# Altium PCB Copy of 701C USB Hub.PcbDoc (part 1 of 2)
Units mil, origin at the board's own origin, x right, y up, seen from the top; angles counter-clockwise.
Board outline 4055.12 x 2244.09 mil, 4 copper layers (Component Side, Ground Plane, Power Plane, Solder Side), stack 61 mil thick; 144 components, 120 nets, 628 pads, 76 vias.
Unrouted connection lines stored in the file: 378.
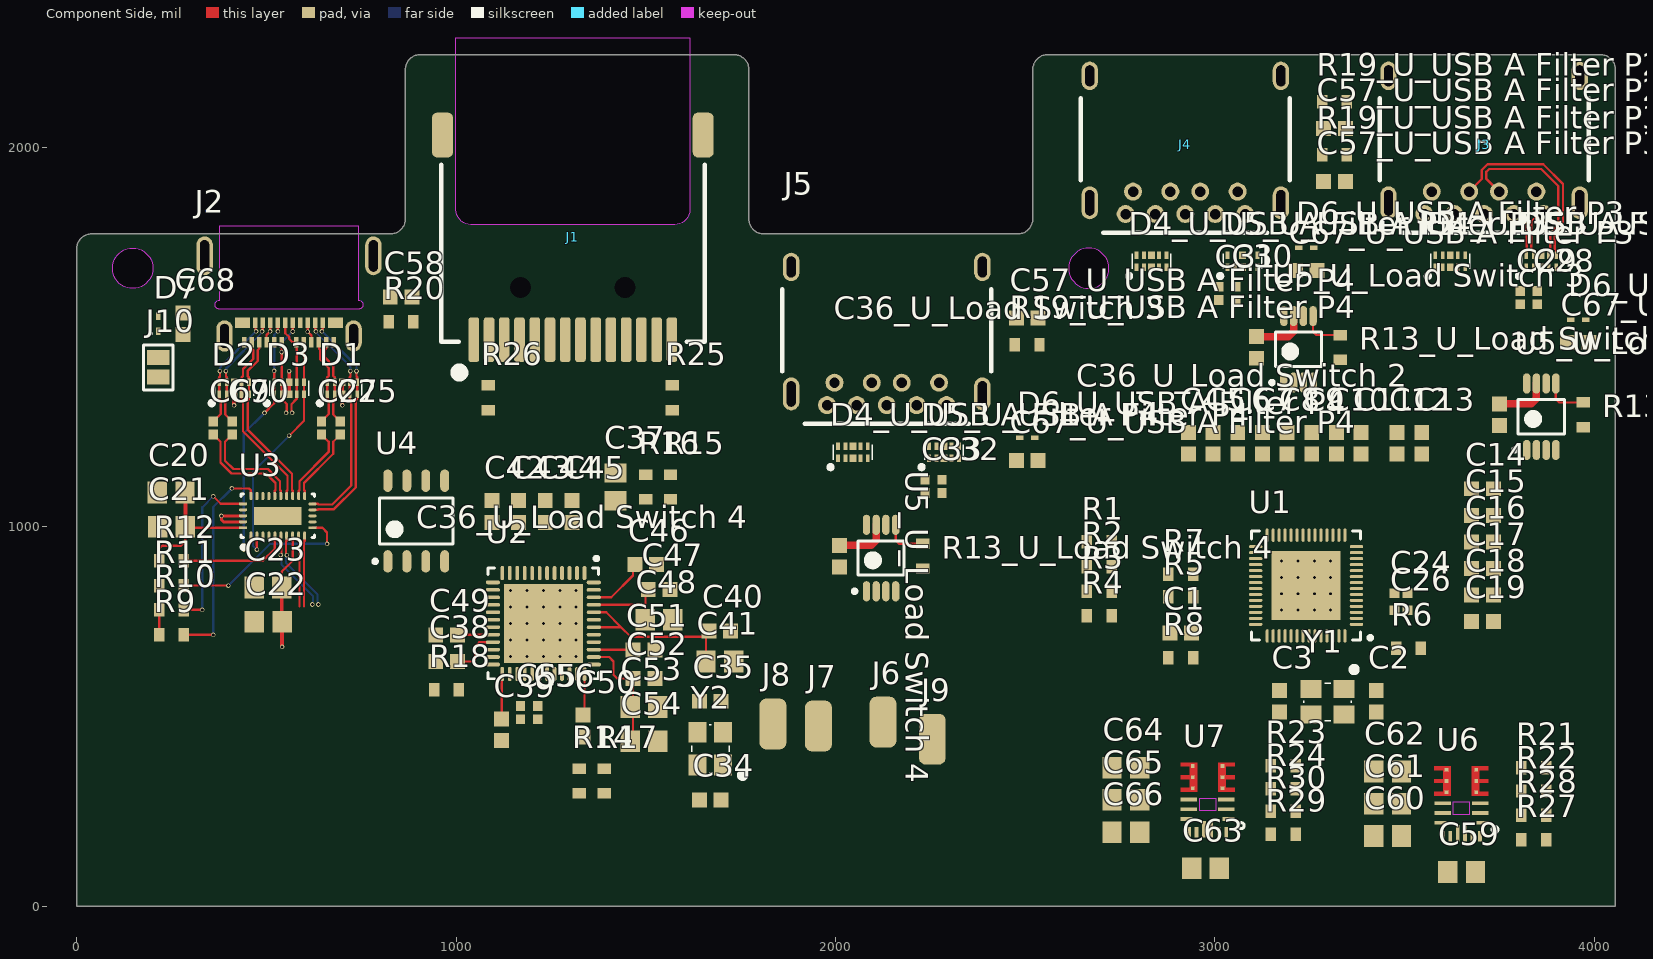
[diagram p0: Component Side view]
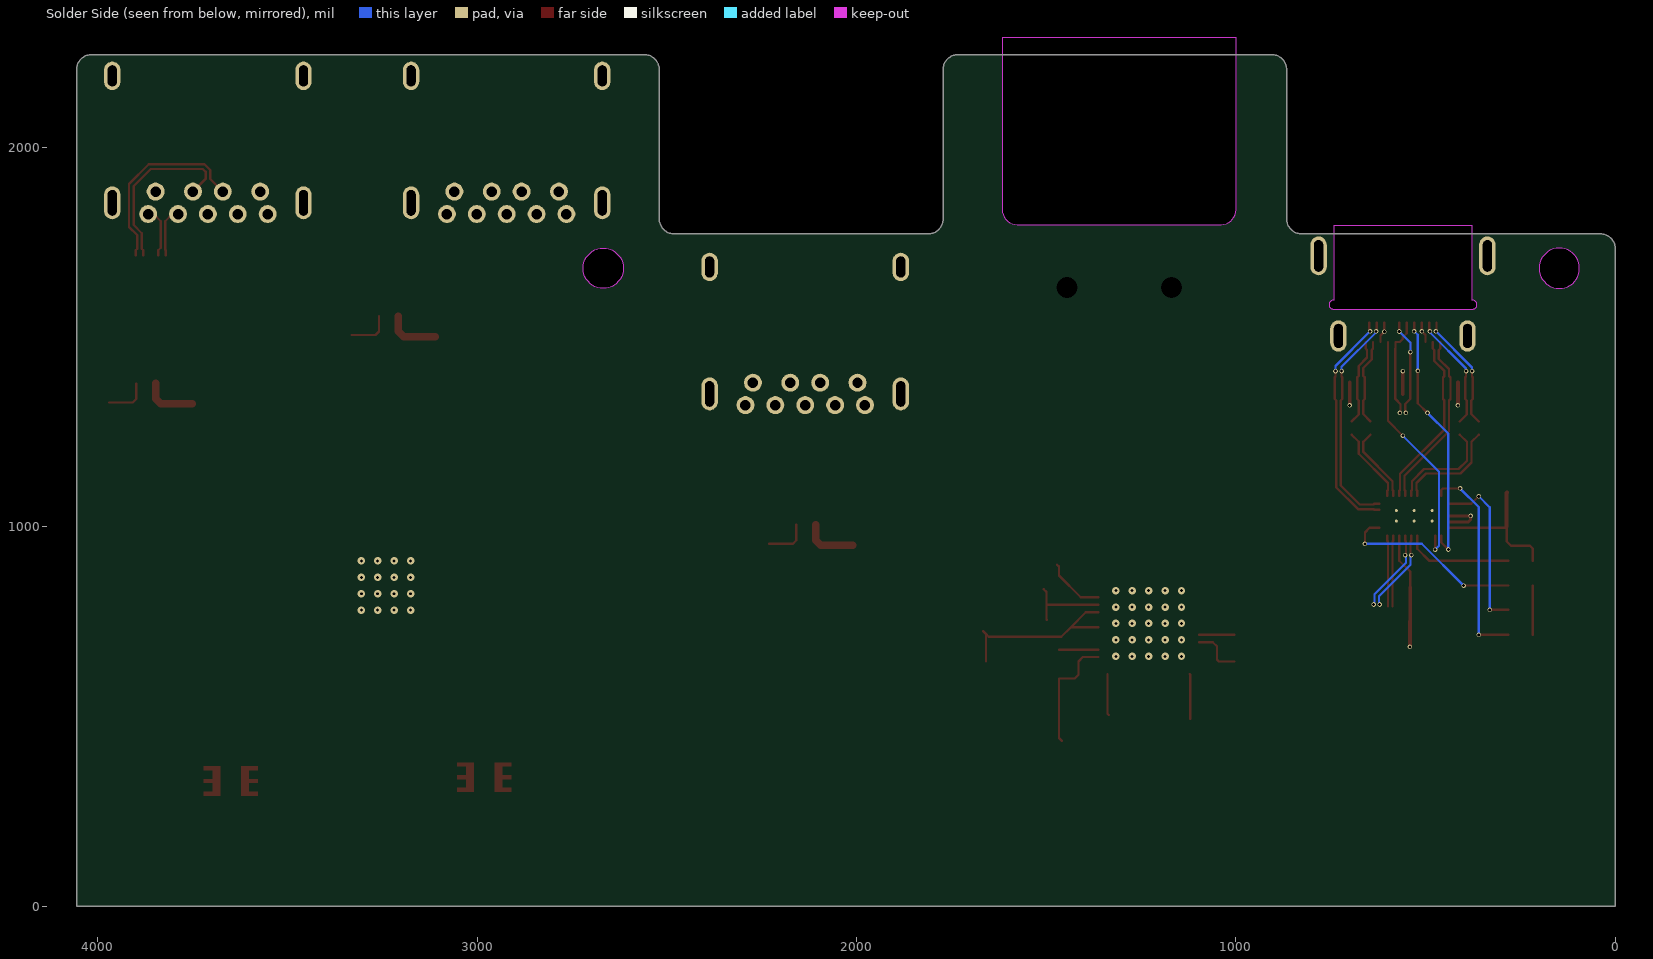
[diagram p1: Solder Side view, seen from below]
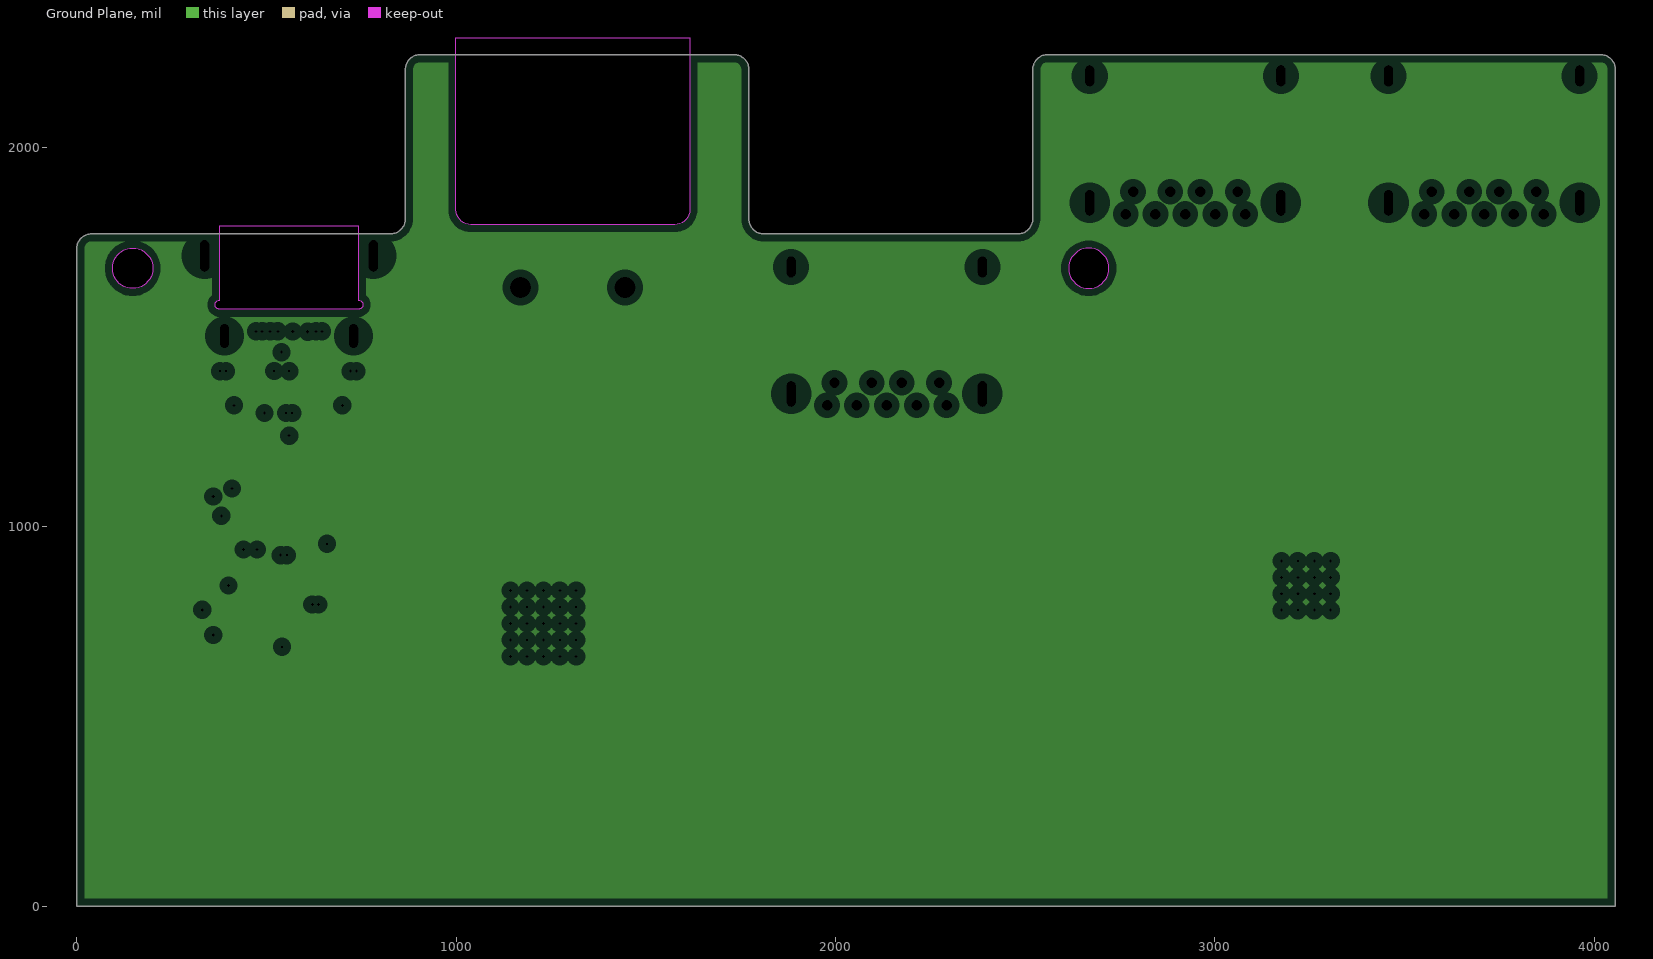
[diagram p2: Ground Plane, clearances drawn from the general rule]
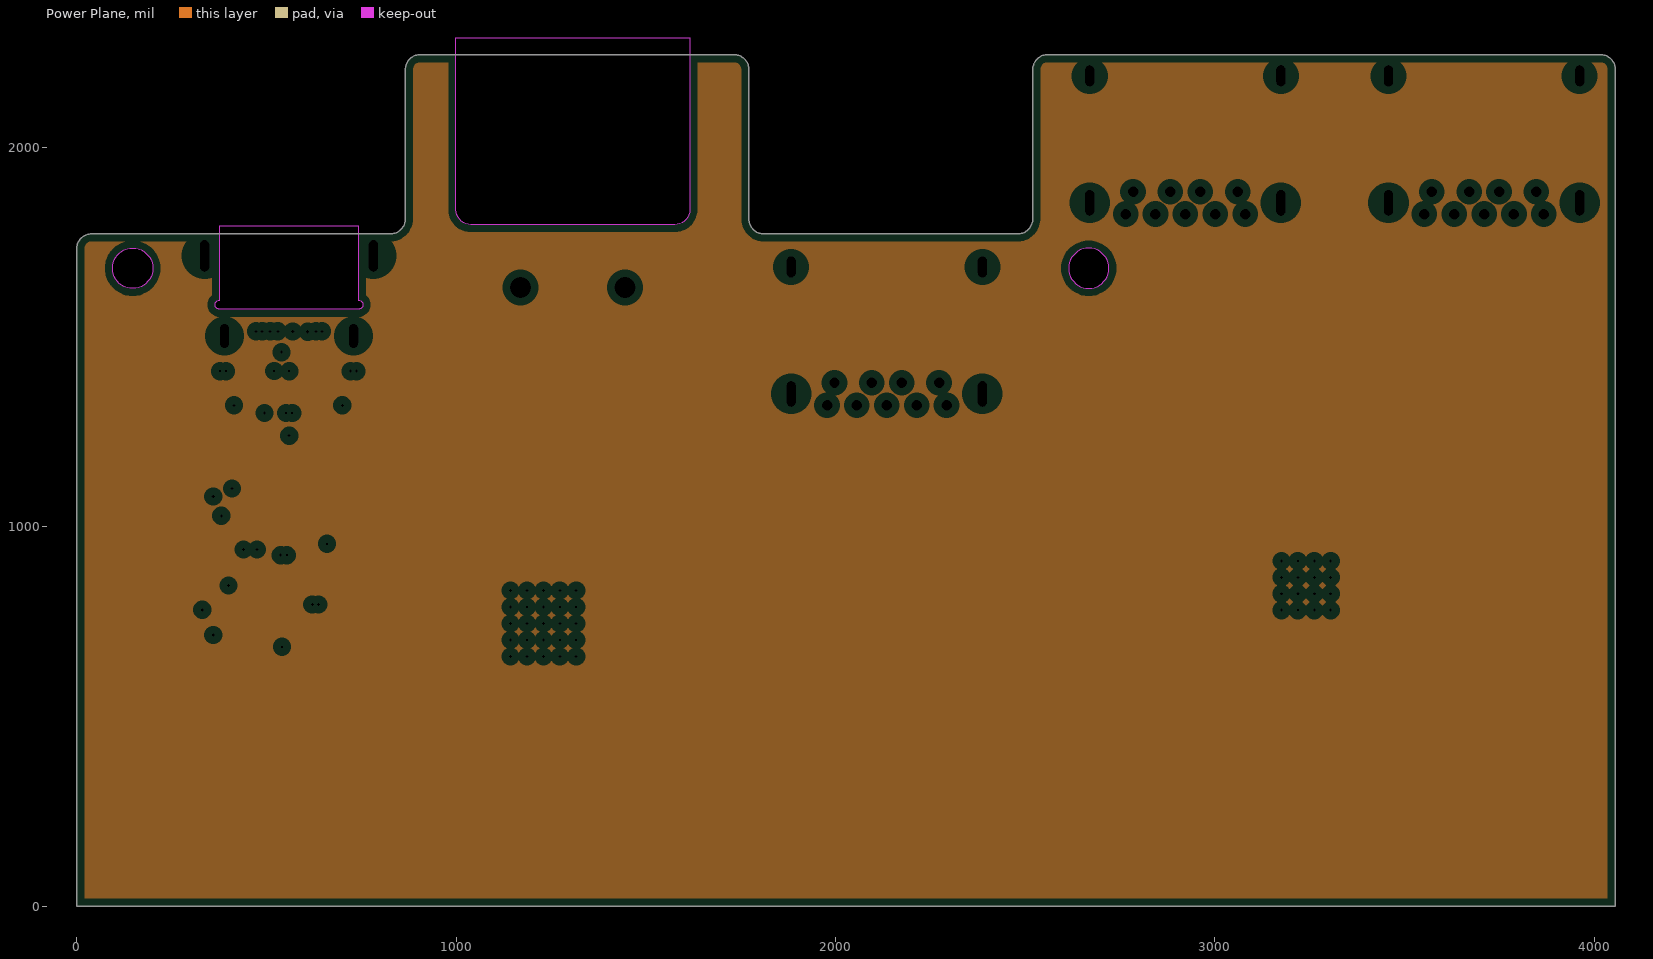
[diagram p3: Power Plane, clearances drawn from the general rule]

## Layer stack, top to bottom
Top Solder: solder mask 0.4, Solder Resist, Dk 3.5
Component Side: signal copper 1.3
Dielectric 1: core 4.3, FR-4, Dk 4.29
Ground Plane: plane copper 1.4
Dielectric 3: prepreg 47, Dk 4.2
Power Plane: plane copper 1.4
Dielectric 4: core 4.3, Dk 4.29
Solder Side: signal copper 1.3
Bottom Solder: solder mask 0.4, Solder Resist, Dk 3.5

## Board outline
0,0 0,1732.28 cw(c39.37,1732.28) 39.37,1771.65 240.16,1771.65 826.77,1771.65 ccw(c826.77,1811.02) 866.14,1811.02 866.14,2204.72 cw(c905.51,2204.72) 905.51,2244.09 1732.28,2244.09 cw(c1732.28,2204.72) 1771.65,2204.72 1771.65,1811.02 ccw(c1811.02,1811.02) 1811.02,1771.65 2480.32,1771.65 ccw(c2480.32,1811.02) 2519.69,1811.02 2519.69,2204.72 cw(c2559.06,2204.72) 2559.06,2244.09 4015.75,2244.09 cw(c4015.75,2204.72) 4055.12,2204.72 4055.12,0
cut-out: 147.64,1627.95 cw(c147.64,1681.1) 94.49,1681.1 cw(c147.64,1681.1) 147.64,1734.25 cw(c147.64,1681.1) 200.79,1681.1 cw(c147.64,1681.1)
cut-out: 2614.17,1681.1 ccw(c2667.32,1681.1) 2667.32,1627.95 ccw(c2667.32,1681.1) 2720.47,1681.1 ccw(c2667.32,1681.1) 2667.32,1734.25 ccw(c2667.32,1681.1)

## Design rules (kind name [scope] priority, off if disabled: settings)
Clearance [All] p1: gap=4 ignorepadtopadclearanceinfootprint=FALSE except(0: Arc-Hole Track-Hole SMDPad-Hole THPad-Hole Via-Hole Fill-Hole Poly-Hole Region-Hole Text-Hole)
DiffPairsRouting DiffPairsRouting_USB_SS [InNetClass('DIFF90SS')] p1: maxlimit=6 minlimit=4 mostfreqgap=6 toplayer_minwidth=4 toplayer_maxwidth=6 toplayer_prefwidth=6 bottomlayer_minwidth=4 bottomlayer_maxwidth=6 bottomlayer_prefwidth=6 maxuncoupledlength=500
DiffPairsRouting DiffPairsRouting_ENET [InNetClass('DIFF100')] p2: maxlimit=6 minlimit=4 mostfreqgap=6 toplayer_minwidth=4 toplayer_maxwidth=5 toplayer_prefwidth=5 bottomlayer_minwidth=4 bottomlayer_maxwidth=5 bottomlayer_prefwidth=5 maxuncoupledlength=500
DiffPairsRouting DiffPairsRouting_USB_HS [InNetClass('DIFF90HS')] p3: maxlimit=6 minlimit=4 mostfreqgap=6 toplayer_minwidth=4 toplayer_maxwidth=6 toplayer_prefwidth=6 bottomlayer_minwidth=4 bottomlayer_maxwidth=6 bottomlayer_prefwidth=6 maxuncoupledlength=500
DiffPairsRouting [All] p4 off: maxlimit=10 minlimit=10 mostfreqgap=10 toplayer_minwidth=15 toplayer_maxwidth=15 toplayer_prefwidth=15 bottomlayer_minwidth=15 bottomlayer_maxwidth=15 bottomlayer_prefwidth=15 maxuncoupledlength=500
MatchedLengths MatchedLengths_USB_SS [InNetClass('DIFF90SS')] p1: tolerance=5 checknetsindiffpair=TRUE checkdiffpairvsdiffpair=FALSE checkxsignals=FALSE checkothers=FALSE
MatchedLengths MatchedLengths_ENET [InNetClass('DIFF100')] p2: tolerance=50 checknetsindiffpair=TRUE checkdiffpairvsdiffpair=FALSE checkxsignals=FALSE checkothers=FALSE
MatchedLengths MatchedLengths_USB_HS [InNetClass('DIFF90HS')] p3: tolerance=50 checknetsindiffpair=TRUE checkdiffpairvsdiffpair=FALSE checkxsignals=FALSE checkothers=FALSE
PlaneClearance [All] p1: clearance=20
PlaneConnect [All] p1: planeconnectstyle=Relief reliefexpansion=20 reliefentries=4 reliefconductorwidth=10 reliefairgap=10
PolygonConnect [All] p1: connectstyle=Relief reliefconductorwidth=10 reliefentries=4 polygonreliefangle="90 Angle" airgapwidth=10
RoomDefinition "U_USB C Filter" [InComponentClass('U_USB C Filter')] p1 off: confinementstyle=ConfineIn formatcopy=TRUE lockcomponents=FALSE outline 8850,140 10415,140 10415,370 8850,370
RoomDefinition "U_USB A Filter P4" [InComponentClass('U_USB A Filter P4')] p2 off: confinementstyle=ConfineIn formatcopy=TRUE lockcomponents=FALSE outline 3375,1580 4115,1580 4115,1840 3375,1840
RoomDefinition "U_USB A Filter P3" [InComponentClass('U_USB A Filter P3')] p3 off: confinementstyle=ConfineIn formatcopy=TRUE lockcomponents=FALSE outline 2589.37,1575 3380,1575 3380,1835 2589.37,1835
RoomDefinition "U_USB A Filter P2" [InComponentClass('U_USB A Filter P2')] p4 off: confinementstyle=ConfineIn formatcopy=TRUE lockcomponents=FALSE outline 1800,992.56 2540,992.56 2540,1252.56 1800,1252.56
RoomDefinition U_Power [InComponentClass('U_Power')] p5 off: confinementstyle=ConfineIn formatcopy=TRUE lockcomponents=FALSE outline 4460,0 5725,0 5725,475 4460,475
RoomDefinition U_MUX [InComponentClass('U_MUX')] p6 off: confinementstyle=ConfineIn formatcopy=TRUE lockcomponents=FALSE outline 8745,530 10640,530 10640,870 8745,870
RoomDefinition "U_Load Switch 4" [InComponentClass('U_Load Switch 4')] p7 off: confinementstyle=ConfineIn formatcopy=TRUE lockcomponents=FALSE outline 3625,1282.44 4005,1282.44 4005,1652.44 3625,1652.44
RoomDefinition "U_Load Switch 3" [InComponentClass('U_Load Switch 3')] p8 off: confinementstyle=ConfineIn formatcopy=TRUE lockcomponents=FALSE outline 2845,1317.56 3225,1317.56 3225,1687.56 2845,1687.56
RoomDefinition "U_Load Switch 2" [InComponentClass('U_Load Switch 2')] p9 off: confinementstyle=ConfineIn formatcopy=TRUE lockcomponents=FALSE outline 2040,730 2420,730 2420,1100 2040,1100
RoomDefinition U_LAN [InComponentClass('U_LAN')] p10 off: confinementstyle=ConfineIn formatcopy=TRUE lockcomponents=FALSE outline 9860,3205 10865,3205 10865,4365 9860,4365
RoomDefinition U_Hub [InComponentClass('U_Hub')] p11 off: confinementstyle=ConfineIn formatcopy=TRUE lockcomponents=FALSE outline 2630,340 3875,340 3875,1260 2630,1260
RoomDefinition "Top Level" [InComponentClass('Top Level')] p12 off: confinementstyle=ConfineIn formatcopy=TRUE lockcomponents=FALSE outline 421.18,4243.03 4516.18,4243.03 4516.18,8215.35 421.18,8215.35
RoutingVias [All] p1: holewidth=10 width=14 viastyle="Through Hole" minholewidth=8 minwidth=12 maxholewidth=16 maxwidth=20
SolderMaskExpansion [All] p1: expansion=4
Width [All] p1: maxlimit=20 minlimit=4 preferedwidth=6 minimp=50.000000 maximp=50.000000 favimp=50.000000
27 further rules are at their usual default settings.

## Classes and differential pairs
net class DIFF100: TR0_N TR0_P TR1_N TR1_P TR2_N TR2_P TR3_N TR3_P
net class DIFF90HS: DFP1_D_N DFP1_D_P DFP2_D_N DFP2_D_P DFP3_D_N DFP3_D_P DFP4_D_N DFP4_D_P UFP_D_N UFP_D_P
net class DIFF90SS: DFP1_RXa_N DFP1_RXa_P DFP1_RXb_N DFP1_RXb_P DFP1_TXa_N DFP1_TXa_P DFP1_TXb_N DFP1_TXb_P DFP2_RX_N DFP2_RX_P DFP2_TXa_N DFP2_TXa_P DFP2_TXb_N DFP2_TXb_P DFP3_RX_N DFP3_RX_P DFP3_TXa_N DFP3_TXa_P DFP3_TXb_N DFP3_TXb_P DFP4_RX_N DFP4_RX_P DFP4_TXa_N DFP4_TXa_P DFP4_TXb_N DFP4_TXb_P MUX_RX_N MUX_RX_P MUX_TX_N MUX_TX_P UFP_RX1_N UFP_RX1_P UFP_RX2_N UFP_RX2_P UFP_TX1_N UFP_TX1_P UFP_TX1b_N UFP_TX1b_P UFP_TX2_N UFP_TX2_P UFP_TX2b_N UFP_TX2b_P
channel class "USB A Filter": "U_USB A Filter P2" "U_USB A Filter P3" "U_USB A Filter P4"
channel class "Load Switch": "U_Load Switch 2" "U_Load Switch 3" "U_Load Switch 4"
component class "U_USB C Filter": C58 C68 D1 D2 D3 D7 J10 R20
component class "U_USB A Filter P4": "C57_U_USB A Filter P4" "C67_U_USB A Filter P4" "D4_U_USB A Filter P4" "D5_U_USB A Filter P4" "D6_U_USB A Filter P4" "R19_U_USB A Filter P4"
component class "U_USB A Filter P3": "C57_U_USB A Filter P3" "C67_U_USB A Filter P3" "D4_U_USB A Filter P3" "D5_U_USB A Filter P3" "D6_U_USB A Filter P3" "R19_U_USB A Filter P3"
component class "U_USB A Filter P2": "C57_U_USB A Filter P2" "C67_U_USB A Filter P2" "D4_U_USB A Filter P2" "D5_U_USB A Filter P2" "D6_U_USB A Filter P2" "R19_U_USB A Filter P2"
component class U_Power: C59 C60 C61 C62 C63 C64 C65 C66 R21 R22 R23 R24 R27 R28 R29 R30 U6 U7
component class U_MUX: C20 C21 C22 C23 R9 R10 R11 R12 U3
component class "U_Load Switch 4": "C36_U_Load Switch 4" "R13_U_Load Switch 4" "U5_U_Load Switch 4"
component class "U_Load Switch 3": "C36_U_Load Switch 3" "R13_U_Load Switch 3" "U5_U_Load Switch 3"
component class "U_Load Switch 2": "C36_U_Load Switch 2" "R13_U_Load Switch 2" "U5_U_Load Switch 2"
component class U_LAN: C34 C35 C37 C38 C39 C40 C41 C42 C43 C44 C45 C46 C47 C48 C49 C50 C51 C52 C53 C54 R14 R15 R16 R17 R18 U2 U4 Y2
component class U_Hub: C1 C2 C3 C4 C5 C6 C7 C8 C9 C10 C11 C12 C13 C14 C15 C16 C17 C18 C19 R1 R2 R3 R4 R5 R6 R7 R8 U1 Y1
component class "Top Level": C24 C25 C26 C27 C28 C29 C30 C31 C32 C33 C55 C56 C69 C70 J1 J2 J3 J4 J5 J6 J7 J8 J9 R25 R26
differential pair TR3: +TR3_P -TR3_N
differential pair TR2: +TR2_P -TR2_N
differential pair TR1: +TR1_P -TR1_N
differential pair TR0: +TR0_P -TR0_N
differential pair UFP_TX2b: +UFP_TX2b_P -UFP_TX2b_N
differential pair UFP_TX1b: +UFP_TX1b_P -UFP_TX1b_N
differential pair MUX_TX: +MUX_TX_P -MUX_TX_N
differential pair MUX_RX: +MUX_RX_P -MUX_RX_N
differential pair DFP4_TXb: +DFP4_TXb_P -DFP4_TXb_N
differential pair DFP4_TXa: +DFP4_TXa_P -DFP4_TXa_N
differential pair DFP4_RX: +DFP4_RX_P -DFP4_RX_N
differential pair DFP4_D: +DFP4_D_P -DFP4_D_N
differential pair DFP3_TXb: +DFP3_TXb_P -DFP3_TXb_N
differential pair DFP3_TXa: +DFP3_TXa_P -DFP3_TXa_N
differential pair DFP3_RX: +DFP3_RX_P -DFP3_RX_N
differential pair DFP3_D: +DFP3_D_P -DFP3_D_N
differential pair DFP2_TXb: +DFP2_TXb_P -DFP2_TXb_N
differential pair DFP2_TXa: +DFP2_TXa_P -DFP2_TXa_N
differential pair DFP2_RX: +DFP2_RX_P -DFP2_RX_N
differential pair DFP2_D: +DFP2_D_P -DFP2_D_N
differential pair DFP1_TXb: +DFP1_TXb_P -DFP1_TXb_N
differential pair DFP1_TXa: +DFP1_TXa_P -DFP1_TXa_N
differential pair DFP1_RXb: +DFP1_RXb_P -DFP1_RXb_N
differential pair DFP1_RXa: +DFP1_RXa_P -DFP1_RXa_N
differential pair DFP1_D: +DFP1_D_P -DFP1_D_N
differential pair UFP_TX2: +UFP_TX2_P -UFP_TX2_N
differential pair UFP_TX1: +UFP_RX2_P -UFP_RX2_N
differential pair UFP_RX2: +UFP_TX1_P -UFP_TX1_N
differential pair UFP_RX1: +UFP_RX1_P -UFP_RX1_N
differential pair UFP_D: +UFP_D_P -UFP_D_N

## Components (designator, comment, footprint, x,y, rotation, side; value= is the part's Value field where it differs from the comment)
C1 "100nF" CAP_SM0603_YAGEOCC2_N 2910,720 r180 top
C2 "10pF" CAP_SM0603_YAGEOCC2_N 3425,540 r90 top
C3 "10pF" CAP_SM0603_YAGEOCC2_N 3170,540 r270 top
C4 "100nF" CAP_SM0603_YAGEOCC2_N 2930,1220 r90 top
C5 "100nF" CAP_SM0603_YAGEOCC2_N 2995,1220 r90 top
C6 "100nF" CAP_SM0603_YAGEOCC2_N 3060,1220 r90 top
C7 "100nF" CAP_SM0603_YAGEOCC2_N 3125,1220 r90 top
C8 "100nF" CAP_SM0603_YAGEOCC2_N 3190,1220 r90 top
C9 "100nF" CAP_SM0603_YAGEOCC2_N 3255,1220 r90 top
C10 "100nF" CAP_SM0603_YAGEOCC2_N 3320,1220 r90 top
C11 "100nF" CAP_SM0603_YAGEOCC2_N 3385,1220 r90 top
C12 "1nF" CAP_SM0603_YAGEOCC2_N 3480,1220 r90 top
C13 "1nF" CAP_SM0603_YAGEOCC2_N 3545,1220 r90 top
C14 "100nF" CAP_SM0603_YAGEOCC2_N 3705,1100 r0 top
C15 "100nF" CAP_SM0603_YAGEOCC2_N 3705,1030 r0 top
C16 "100nF" CAP_SM0603_YAGEOCC2_N 3705,960 r0 top
C17 "100nF" CAP_SM0603_YAGEOCC2_N 3705,890 r0 top
C18 "1nF" CAP_SM0603_YAGEOCC2_N 3705,820 r0 top
C19 "1nF" CAP_SM0603_YAGEOCC2_N 3705,750 r0 top
C20 "1uF" CAP_SM0805_YAGEOCC2_N 249.02,1090 r180 top
C21 "1uF" CAP_SM0805_YAGEOCC2_N 250,1000 r180 top
C22 "1uF" CAP_SM0805_YAGEOCC2_N 505,750 r180 top
C23 "1uF" CAP_SM0805_YAGEOCC2_N 504.02,840 r180 top
C24 "100nF" CAP_SM0402_YAGEOCA2_N 3490,825 r0 top
C25 "100nF" CAP_SM0402_YAGEOCA2_N 695,1260 r270 top
C26 "100nF" CAP_SM0402_YAGEOCA2_N 3490,780 r0 top
C27 "100nF" CAP_SM0402_YAGEOCA2_N 645,1260 r270 top
C28 "100nF" CAP_SM0402_YAGEOCA2_N 3849.21,1603.55 r90 top
C29 "100nF" CAP_SM0402_YAGEOCA2_N 3804.21,1603.55 r90 top
C30 "100nF" CAP_SM0402_YAGEOCA2_N 3055,1615 r90 top
C31 "100nF" CAP_SM0402_YAGEOCA2_N 3010,1615 r90 top
C32 "100nF" CAP_SM0402_YAGEOCA2_N 2280.79,1106.45 r90 top
C33 "100nF" CAP_SM0402_YAGEOCA2_N 2235.79,1106.45 r90 top
C34 "10pF" CAP_SM0603_YAGEOCC2_N 1670,280 r180 top
C35 "10pF" CAP_SM0603_YAGEOCC2_N 1670,540 r0 top
"C36_U_Load Switch 2" "100nF" CAP_SM0603_YAGEOCC2_N 3750,1295 r270 top (schematic designator C36)
"C36_U_Load Switch 3" "100nF" CAP_SM0603_YAGEOCC2_N 3110,1472.56 r270 top (schematic designator C36)
"C36_U_Load Switch 4" "100nF" CAP_SM0603_YAGEOCC2_N 2010,922.44 r270 top (schematic designator C36)
C37 "1uF" CAP_SM0805_YAGEOCC2_N 1420,1105 r270 top
C38 "100nF" CAP_SM0603_YAGEOCC2_N 975,645 r180 top
C39 "100nF" CAP_SM0603_YAGEOCC2_N 1120,465 r270 top
C40 "100nF" CAP_SM0603_YAGEOCC2_N 1695,725 r0 top
C41 "1uF" CAP_SM0805_YAGEOCC2_N 1695,645 r0 top
C42 "100nF" CAP_SM0603_YAGEOCC2_N 1095,1040 r90 top
C43 "100nF" CAP_SM0603_YAGEOCC2_N 1165,1040 r90 top
C44 "100nF" CAP_SM0603_YAGEOCC2_N 1235,1040 r90 top
C45 "100nF" CAP_SM0603_YAGEOCC2_N 1305,1040 r90 top
C46 "100nF" CAP_SM0603_YAGEOCC2_N 1500,900 r0 top
C47 "100nF" CAP_SM0603_YAGEOCC2_N 1535,835 r0 top
C48 "1uF" CAP_SM0805_YAGEOCC2_N 1535,755 r0 top
C49 "100nF" CAP_SM0603_YAGEOCC2_N 975,715 r180 top
C50 "100nF" CAP_SM0603_YAGEOCC2_N 1335,475 r270 top
C51 "100nF" CAP_SM0603_YAGEOCC2_N 1495,675 r0 top
C52 "100nF" CAP_SM0603_YAGEOCC2_N 1495,600 r0 top
C53 "1uF" CAP_SM0805_YAGEOCC2_N 1495,525 r0 top
C54 "1uF" CAP_SM0805_YAGEOCC2_N 1495,435 r0 top
C55 "100nF" CAP_SM0402_YAGEOCA2_N 1170,510 r90 top
C56 "100nF" CAP_SM0402_YAGEOCA2_N 1215,510 r90 top
"C57_U_USB A Filter P2" "100nF" CAP_SM0603_YAGEOCC2_N 3315,2050 r180 top (schematic designator C57)
"C57_U_USB A Filter P3" "100nF" CAP_SM0603_YAGEOCC2_N 3315,1910 r0 top (schematic designator C57)
"C57_U_USB A Filter P4" "100nF" CAP_SM0603_YAGEOCC2_N 2505,1550 r0 top (schematic designator C57)
C58 "100nF" CAP_SM0603_YAGEOCC2_N 855,1605 r0 top
C59 "2.2uF" CAP_SM0805_YAGEOCC2_N 3650,90 r180 top
C60 "2.2uF" CAP_SM0805_YAGEOCC2_N 3455,185 r180 top
C61 "2.2uF" CAP_SM0805_YAGEOCC2_N 3455,270 r180 top
C62 "2.2uF" CAP_SM0805_YAGEOCC2_N 3455,355 r180 top
C63 "2.2uF" CAP_SM0805_YAGEOCC2_N 2975,100 r180 top
C64 "2.2uF" CAP_SM0805_YAGEOCC2_N 2765,365 r0 top
C65 "2.2uF" CAP_SM0805_YAGEOCC2_N 2765,280 r0 top
C66 "2.2uF" CAP_SM0805_YAGEOCC2_N 2765,195 r0 top
"C67_U_USB A Filter P2" "100nF" CAP_SM0603_YAGEOCC2_N 3957.44,1485 r0 top (schematic designator C67)
"C67_U_USB A Filter P3" "100nF" CAP_SM0603_YAGEOCC2_N 3240.31,1675 r0 top (schematic designator C67)
"C67_U_USB A Filter P4" "100nF" CAP_SM0603_YAGEOCC2_N 2505,1175 r0 top (schematic designator C67)
C68 "100nF" CAP_SM0603_YAGEOCC2_N 280,1535 r90 top
C69 "100nF" CAP_SM0402_YAGEOCA2_N 360,1260 r270 top
C70 "100nF" CAP_SM0402_YAGEOCA2_N 410,1260 r270 top
D1 "ESD8004MUTAG" ESD8004MUTAG 700,1365 r0 top
D2 "ESD8004MUTAG" ESD8004MUTAG 415,1365 r0 top
D3 "ESD8004MUTAG" ESD8004MUTAG 560,1365 r0 top
"D4_U_USB A Filter P2" "ESD8004MUTAG" ESD8004MUTAG 3620,1700 r0 top (schematic designator D4)
"D4_U_USB A Filter P3" "ESD8004MUTAG" ESD8004MUTAG 2832.6,1700 r0 top (schematic designator D4)
"D4_U_USB A Filter P4" "ESD8004MUTAG" ESD8004MUTAG 2045.79,1196.45 r0 top (schematic designator D4)
"D5_U_USB A Filter P2" "ESD8004MUTAG" ESD8004MUTAG 3860,1700 r0 top (schematic designator D5)
"D5_U_USB A Filter P3" "ESD8004MUTAG" ESD8004MUTAG 3072.6,1700 r0 top (schematic designator D5)
"D5_U_USB A Filter P4" "ESD8004MUTAG" ESD8004MUTAG 2285.79,1196.45 r0 top (schematic designator D5)
"D6_U_USB A Filter P2" "ESD9C5.0ST5G" "SODFL100X40-2N - ESD9C5.0ST5G" 3957.44,1545 r0 top (schematic designator D6)
"D6_U_USB A Filter P3" "ESD9C5.0ST5G" "SODFL100X40-2N - ESD9C5.0ST5G" 3240.31,1735 r0 top (schematic designator D6)
"D6_U_USB A Filter P4" "ESD9C5.0ST5G" "SODFL100X40-2N - ESD9C5.0ST5G" 2505,1235 r0 top (schematic designator D6)
D7 "ESD9C5.0ST5G" "SODFL100X40-2N - ESD9C5.0ST5G" 215,1535 r90 top
J1 "7498111120R" 7498111120R 1307.68,1630.75 r0 top
J2 "1054550101" 1054550101 559.64,1537.84 r180 top
J3 "0483930003" 0483930003 3709.25,1853.59 r180 top
J4 "0483930003" 0483930003 2921.85,1853.59 r180 top
J5 "0483930003" 0483930003 2135.04,1350.04 r180 top
J6 "RCS-0C" RCS-0C 2125,485 r0 top
J7 "RCS-0C" RCS-0C 1955,475 r0 top
J8 "RCS-0C" RCS-0C 1835,480 r0 top
J9 "RCS-0C" RCS-0C 2255,440 r0 top
J10 "Jumper SMD 2" "Jumper SMD 2" 215,1420 r90 top
R1 "10K" RES_SM0603_YAGEORC_N 2695,960 r0 top
R2 "10K" RES_SM0603_YAGEORC_N 2695,895 r0 top
R3 "200K" RES_SM0603_YAGEORC_N 2695,830 r0 top
R4 "200K" RES_SM0603_YAGEORC_N 2695,765 r0 top
R5 "39K" RES_SM0603_YAGEORC_N 2910,815 r180 top
R6 "12K" RES_SM0603_YAGEORC_N 3510,680 r180 top
R7 "82K" RES_SM0603_YAGEORC_N 2910,875 r0 top
R8 "10K" RES_SM0603_YAGEORC_N 2910,655 r180 top
R9 "4K7" RES_SM0603_YAGEORC_N 250,715 r180 top
R10 "4K7" RES_SM0603_YAGEORC_N 250,780.98 r180 top
R11 "220K" RES_SM0603_YAGEORC_N 250,845 r180 top
R12 "909K" RES_SM0603_YAGEORC_N 250,910 r180 top
"R13_U_Load Switch 2" "270R" RES_SM0603_YAGEORC_N 3970,1295 r90 top (schematic designator R13)
"R13_U_Load Switch 3" "270R" RES_SM0603_YAGEORC_N 3330,1472.56 r90 top (schematic designator R13)
"R13_U_Load Switch 4" "270R" RES_SM0603_YAGEORC_N 2230,922.44 r90 top (schematic designator R13)
R14 "12K" RES_SM0603_YAGEORC_N 1325,330 r270 top
R15 "1K" RES_SM0603_YAGEORC_N 1565,1105 r90 top
R16 "1K" RES_SM0603_YAGEORC_N 1500,1105 r270 top
R17 "12K" RES_SM0603_YAGEORC_N 1390,330 r90 top
R18 "12K" RES_SM0603_YAGEORC_N 975,570 r180 top
"R19_U_USB A Filter P2" "330R" RES_SM0603_YAGEORC_N 3315,2120 r0 top (schematic designator R19)
"R19_U_USB A Filter P3" "330R" RES_SM0603_YAGEORC_N 3315,1980 r180 top (schematic designator R19)
"R19_U_USB A Filter P4" "330R" RES_SM0603_YAGEORC_N 2505,1480 r180 top (schematic designator R19)
R20 "330R" RES_SM0603_YAGEORC_N 855,1540 r180 top
R21 "68K" RES_SM0603_YAGEORC_N 3840,365 r0 top
R22 "22K" RES_SM0603_YAGEORC_N 3840,303.5 r180 top
R23 "56K" RES_SM0603_YAGEORC_N 3180,370 r0 top
R24 "120K" RES_SM0603_YAGEORC_N 3180,310 r180 top
R25 "100R" RES_SM0603_YAGEORC_N 1570,1340 r90 top
R26 "100R" RES_SM0603_YAGEORC_N 1085,1340 r90 top
R27 "120K" RES_SM0603_YAGEORC_N 3840,175 r180 top
R28 "120K" RES_SM0603_YAGEORC_N 3840,240 r180 top
R29 "120K" RES_SM0603_YAGEORC_N 3180,190 r180 top
R30 "120K" RES_SM0603_YAGEORC_N 3180,250 r180 top
U1 "USB5744/2G abc" "QFN40P700X700X100_HS-57N - USB5744/2G" 3240,845 r180 top
U2 "LAN7800/Y9X" "QFN50P700X700X100_HS-49N - LAN7800/Y9X" 1230,745 r270 top
U3 "HD3SS3220IRNHT" "QFN40P250X450X80_HS-31N - HD3SS3220IRNHT" 530,1028.78 r90 top
U4 "93AA66CT-I/SN" "SOIC127P600X175-8N - 93AA66CT-I/SN" 895,1015 r90 top
"U5_U_Load Switch 2" "MIC2544-1YMM" "TSOP65P490X110-8N - MIC2544-1YMM" 3860,1290 r90 top (schematic designator U5)
"U5_U_Load Switch 3" "MIC2544-1YMM" "TSOP65P490X110-8N - MIC2544-1YMM" 3220,1467.56 r90 top (schematic designator U5)
"U5_U_Load Switch 4" "MIC2544-1YMM" "TSOP65P490X110-8N - MIC2544-1YMM" 2120,917.44 r90 top (schematic designator U5)
U6 "MPM3610AGQV-P" MPM3610AGQV-P 3649.37,280.79 r180 top
U7 "MPM3610AGQV-P" MPM3610AGQV-P 2980.63,290.79 r180 top
Y1 "ABM8G-25.000MHZ-B4Y-T" ABM8G-25.000MHZ-B4Y-T 3296.69,538.46 r180 top
Y2 "ABM8G-25.000MHZ-B4Y-T" ABM8G-25.000MHZ-B4Y-T 1670,415 r90 top

## Footprints (in the part's own frame and the unit in brackets; to place one, negate y for a bottom-side part, rotate by r counter-clockwise, add the part's x,y. Pads: shape width x height; smd on the part's side, far side on the other; paste and mask are expansions set on the pad)
0483930003 [mm] "CONN RCPT USB3.0 TYPEA 9POS R/A"
  round 1.2 hole 0.7 unplated: 1(-3.5,-0.75) 2(-1,-0.75) 3(1,-0.75) 4(3.5,-0.75) 5(4,0.75) 6(2,0.75) 7(0,0.75) 8(-2,0.75) 9(-4,0.75)
  oval 1.1x2.2 hole 0.6 slot 1.7 at 90 deg unplated: SHD(-6.4,0) SHD(6.4,0)
  oval 1.1x1.9 hole 0.6 slot 1.4 at 90 deg unplated: SHD(-6.4,-8.5) SHD(6.4,-8.5)
  silkscreen extent -7,-7 7,2, body extent -6.9,-12.5 6.9,1.75, height 6.95
1054550101 [mm] "CONN RCP USB3.1 TYPEC 24P SMD RA"
  rect 0.3x0.7 smd: A1(-3,1.3) A2(-2.5,1.3) A3(-2,1.3) A4(-1.5,1.3) A5(-1,1.3) A6(-0.5,1.3) A7(0.5,1.3) A8(1,1.3) A9(1.5,1.3) A10(2,1.3) A11(2.5,1.3) A12(3,1.3) B2(2.25,0) B3(1.75,0) B4(1.25,0) B5(0.75,0) B6(0.25,0) B7(-0.25,0) B8(-0.75,0) B9(-1.25,0) B10(-1.75,0) B11(-2.25,0)
  rect 1x0.7 smd: B1(3.1,0) B12(-3.1,0)
  oval 1.1x2.6 hole 0.6 slot 2.1 at 90 deg unplated: SHD(-5.65,-4.47) SHD(5.65,-4.47)
  oval 1.1x2.1 hole 0.6 slot 1.6 at 90 deg unplated: SHD(-4.32,0.89) SHD(4.32,0.89)
  Keep-Out Layer board cut-out: -4.65,-6.5 -4.65,-1.5 -4.78,-1.47 -4.885,-1.387 -4.942,-1.267 -4.942,-1.133 -4.885,-1.013 -4.78,-0.93 -4.65,-0.9 -4.65,-0.9 4.65,-0.9 4.78,-0.93 4.885,-1.013 4.942,-1.133 4.942,-1.267 4.885,-1.387 4.78,-1.47 4.65,-1.5 4.65,-1.5 4.65,-6.5
  body extent -5.8,-6.57 5.8,1.33, height 2.17
7498111120R [mm] "CONN JACK 1PORT 1000 BASE-T SMD"
  rrect50% 0.71x3 smd: 1(-6.63,-3.5) 2(-5.61,-3.5) 3(-4.59,-3.5) 4(-3.57,-3.5) 5(-2.55,-3.5) 6(-1.53,-3.5) 7(-0.51,-3.5) 8(0.51,-3.5) 9(1.53,-3.5) 10(2.55,-3.5) 11(3.57,-3.5) 12(4.59,-3.5) 13(5.61,-3.5) 14(6.63,-3.5)
  round 0 hole 1.4 unplated: 16(-3.5,0) 17(3.5,0)
  rrect50% 1.4x3 smd: SHD(-8.725,10.2) SHD(8.725,10.2)
  Keep-Out Layer board cut-out: -7.825,5.194 -7.825,16.7 7.825,16.7 7.825,5.194 7.688,4.695 7.32,4.331 6.819,4.2 6.819,4.2 6.819,4.2 -6.819,4.2 -6.819,4.2 -7.32,4.331 -7.688,4.695 -7.825,5.194
  Keep-Out Layer board cut-out: 7.825,16.7
  silkscreen extent -8.82,-5.8 8.82,8.2, body extent -9.07,-4.26 9.08,18.22, height 10.1
ABM8G-25.000MHZ-B4Y-T [mm] "CRYSTAL 25.0000MHZ 10PF SMD"
  rect 1.4x1.2 smd: 1(-1.1,-0.85) 3(1.1,0.85) GND(-1.1,0.85) GND(1.1,-0.85)
  silkscreen extent -1.9,-2.29 1.6,1.25
CAP_SM0402_YAGEOCA2_N [mm] "Capacitor, Yageo CA Class2, SM0402, IPC Medium Density"
  rect 0.66x0.62 smd: 1(-0.44,0) 2(0.44,0)
  body extent -0.53,-0.28 0.53,0.27, height 0.55
CAP_SM0603_YAGEOCC2_N [mm] "Capacitor, Yageo CC Class2, SM0603, IPC Medium Density"
  rect 1x1 smd: 1(-0.727,0) 2(0.727,0)
  body extent -0.9,-0.5 0.9,0.5, height 0.9
CAP_SM0805_YAGEOCC2_N [mm] "Capacitor, Yageo CC Class2, SM0805, IPC Medium Density"
  rect 1.3x1.45 smd: 1(-0.927,0) 2(0.927,0)
  body extent -1.1,-0.72 1.1,0.72, height 1.45
ESD8004MUTAG [mm]
  rect 0.25x0.5 smd: 1(-1,-0.4) 1(-1,0.4) 2(-0.5,-0.4) 2(-0.5,0.4) 4(0.5,-0.4) 4(0.5,0.4) 5(1,-0.4) 5(1,0.4)
  rect 0.45x0.5 smd: GND(0,-0.4) GND(0,0.4)
  silkscreen extent -1.63,-1.13 1.3,0.5
"Jumper SMD 2" [mm]
  rect 1x1.5 smd: 1(-0.65,0) 2(0.65,0)
  silkscreen extent -1.5,-1 1.5,1
MPM3610AGQV-P [mm] "DC DC CONVERTER 0.8-18.48V"
  rect 0.8x0.25 smd: 1(-1.4,1.55) 12(1.4,1.55)
  rect 1.1x0.25 smd: 2(-1.25,0.9) 3(-1.25,0.25) 10(1.25,0.25) 11(1.25,0.9)
  rect 0.25x0.25 smd: 4(-1,-0.5) 5(-1,-1.25) 6(-1,-2) 7(1,-2) 8(1,-1.25) 9(1,-0.5)
  rect 0.25x0.7 smd: 13(1.25,2.45) 14(0.75,2.45) 17(-0.75,2.45) 18(-1.25,2.45)
  rect 0.25x1.1 smd: 15(0.25,2.25) 16(-0.25,2.25)
  Component Side region: -0.7,-2.225 -0.7,-0.275 -1.8,-0.275 -1.8,-0.525 -1.2,-0.525 -1.2,-1.125 -1.8,-1.125 -1.8,-1.375 -1.2,-1.375 -1.2,-1.975 -1.8,-1.975 -1.8,-2.225
  Component Side region: 0.7,-2.225 0.7,-0.275 1.8,-0.275 1.8,-0.525 1.2,-0.525 1.2,-1.125 1.8,-1.125 1.8,-1.375 1.2,-1.375 1.2,-1.975 1.8,-1.975 1.8,-2.225
  Component Side keep-out region: -0.575,0.18 0.575,0.18 0.575,0.97 -0.575,0.97
  silkscreen extent -2.45,1.8 -2.05,2.2, body extent -1.5,-2.5 1.5,2.5, height 1.58
"QFN40P250X450X80_HS-31N - HD3SS3220IRNHT" [mm] "QFN, 30-Leads, Body 2.50x4.50mm, Pitch 0.40mm, Thermal Pad 1.20x3.20mm, IPC Medium Density"
  oval 0.55x0.2 smd: 1(-1.325,1.8) 2(-1.325,1.4) 3(-1.325,1) 4(-1.325,0.6) 5(-1.325,0.2) 6(-1.325,-0.2) 7(-1.325,-0.6) 8(-1.325,-1) 9(-1.325,-1.4) 10(-1.325,-1.8) 16(1.325,-1.8) 17(1.325,-1.4) 18(1.325,-1) 19(1.325,-0.6) 20(1.325,-0.2) 21(1.325,0.2) 22(1.325,0.6) 23(1.325,1) 24(1.325,1.4) 25(1.325,1.8)
  oval 0.2x0.55 smd: 11(-0.8,-2.325) 12(-0.4,-2.325) 13(0,-2.325) 14(0.4,-2.325) 15(0.8,-2.325) 26(0.8,2.325) 27(0.4,2.325) 28(0,2.325) 29(-0.4,2.325) 30(-0.8,2.325)
  round 0.2 all layers, no hole: 31(-0.35,1.2) 31(-0.35,0) 31(-0.35,-1.2) 31(0.35,1.2) 31(0.35,0) 31(0.35,-1.2)
  rect 1.2x3.2 smd: 31(0,0)
  silkscreen extent -2.22,-2.45 1.45,2.45, body extent -1.3,-2.3 1.3,2.3, height 0.8
"QFN40P700X700X100_HS-57N - USB5744/2G" [mm] "QFN, 56-Leads, Body 7.00x7.00mm, Pitch 0.40mm, Thermal Pad 4.60x4.60mm, IPC Medium Density"
  oval 0.9x0.2 smd: 1(-3.375,2.6) 2(-3.375,2.2) 3(-3.375,1.8) 4(-3.375,1.4) 5(-3.375,1) 6(-3.375,0.6) 7(-3.375,0.2) 8(-3.375,-0.2) 9(-3.375,-0.6) 10(-3.375,-1) 11(-3.375,-1.4) 12(-3.375,-1.8) 13(-3.375,-2.2) 14(-3.375,-2.6) 29(3.375,-2.6) 30(3.375,-2.2) 31(3.375,-1.8) 32(3.375,-1.4) 33(3.375,-1) 34(3.375,-0.6) 35(3.375,-0.2) 36(3.375,0.2) 37(3.375,0.6) 38(3.375,1) 39(3.375,1.4) 40(3.375,1.8) 41(3.375,2.2) 42(3.375,2.6)
  oval 0.2x0.9 smd: 15(-2.6,-3.375) 16(-2.2,-3.375) 17(-1.8,-3.375) 18(-1.4,-3.375) 19(-1,-3.375) 20(-0.6,-3.375) 21(-0.2,-3.375) 22(0.2,-3.375) 23(0.6,-3.375) 24(1,-3.375) 25(1.4,-3.375) 26(1.8,-3.375) 27(2.2,-3.375) 28(2.6,-3.375) 43(2.6,3.375) 44(2.2,3.375) 45(1.8,3.375) 46(1.4,3.375) 47(1,3.375) 48(0.6,3.375) 49(0.2,3.375) 50(-0.2,3.375) 51(-0.6,3.375) 52(-1,3.375) 53(-1.4,3.375) 54(-1.8,3.375) 55(-2.2,3.375) 56(-2.6,3.375)
  rect 4.6x4.6 smd: 57(0,0)
  silkscreen extent -4.43,-3.65 3.65,3.65, body extent -3.5,-3.5 3.5,3.5, height 1
"QFN50P700X700X100_HS-49N - LAN7800/Y9X" [mm] "QFN, 48-Leads, Body 7.00x7.00mm, Pitch 0.50mm, Thermal Pad 5.30x5.30mm, IPC Medium Density"
  oval 0.95x0.25 smd: 1(-3.375,2.75) 2(-3.375,2.25) 3(-3.375,1.75) 4(-3.375,1.25) 5(-3.375,0.75) 6(-3.375,0.25) 7(-3.375,-0.25) 8(-3.375,-0.75) 9(-3.375,-1.25) 10(-3.375,-1.75) 11(-3.375,-2.25) 12(-3.375,-2.75) 25(3.375,-2.75) 26(3.375,-2.25) 27(3.375,-1.75) 28(3.375,-1.25) 29(3.375,-0.75) 30(3.375,-0.25) 31(3.375,0.25) 32(3.375,0.75) 33(3.375,1.25) 34(3.375,1.75) 35(3.375,2.25) 36(3.375,2.75)
  oval 0.25x0.95 smd: 13(-2.75,-3.375) 14(-2.25,-3.375) 15(-1.75,-3.375) 16(-1.25,-3.375) 17(-0.75,-3.375) 18(-0.25,-3.375) 19(0.25,-3.375) 20(0.75,-3.375) 21(1.25,-3.375) 22(1.75,-3.375) 23(2.25,-3.375) 24(2.75,-3.375) 37(2.75,3.375) 38(2.25,3.375) 39(1.75,3.375) 40(1.25,3.375) 41(0.75,3.375) 42(0.25,3.375) 43(-0.25,3.375) 44(-0.75,3.375) 45(-1.25,3.375) 46(-1.75,3.375) 47(-2.25,3.375) 48(-2.75,3.375)
  rect 5.3x5.3 smd: PAD(0,0)
  silkscreen extent -4.47,-3.7 3.7,3.7, body extent -3.55,-3.55 3.55,3.55, height 1
RCS-0C [mm] "1206 Test Point"
  rrect50% 1.8x3.4 smd: 1(0,0)
RES_SM0603_YAGEORC_N [mm] "Resistor, Yageo RC_L, SM0603, IPC Medium Density"
  rect 0.7x0.9 smd: 1(-0.827,0) 2(0.827,0)
  body extent -0.85,-0.45 0.85,0.45, height 0.55
"SODFL100X40-2N - ESD9C5.0ST5G" [mm] "SODFL, 2-Leads, Body 0.60x1.00mm, IPC Medium Density"
  rect 0.5x0.3 smd: 1(-0.5,0) 2(0.5,0)
  silkscreen extent -0.7,0.4 -0.6,0.5, body extent -0.42,-0.33 0.43,0.33, height 0.4
"SOIC127P600X175-8N - 93AA66CT-I/SN" [mm] "SOIC, 8-Leads, Body 4.90x3.90mm, Pitch 1.27mm, IPC Medium Density"
  oval 1.5x0.6 smd: 1(-2.7,1.905) 2(-2.7,0.635) 3(-2.7,-0.635) 4(-2.7,-1.905) 5(2.7,-1.905) 6(2.7,-0.635) 7(2.7,0.635) 8(2.7,1.905)
  silkscreen extent -2.82,-2.45 1.55,2.88, body extent -1.95,-2.45 1.95,2.45, height 1.75
"TSOP65P490X110-8N - MIC2544-1YMM" [mm] "TSOP, 8-Leads, Body 3.00x3.00mm, Pitch 0.65mm, IPC Medium Density"
  oval 1.35x0.5 smd: 1(-2.225,0.975) 2(-2.225,0.325) 3(-2.225,-0.325) 4(-2.225,-0.975) 5(2.225,-0.975) 6(2.225,-0.325) 7(2.225,0.325) 8(2.225,0.975)
  silkscreen extent -2.35,-1.55 1.15,1.9, body extent -1.55,-1.55 1.55,1.55, height 1.1

## Part data
C1 C4 C5 C6 C7 C8 C9 C10 C11 C14 C15 C16 C17 "C36_U_Load Switch 2" "C36_U_Load Switch 3" "C36_U_Load Switch 4" C38 C39 C40 C42 C43 C44 C45 C46 C47 C49 C50 C51 C52 "C57_U_USB A Filter P2" "C57_U_USB A Filter P3" "C57_U_USB A Filter P4" C58 "C67_U_USB A Filter P2" "C67_U_USB A Filter P3" "C67_U_USB A Filter P4" C68: library part CC0603KRX7R9BB104, "CAP 100nF SM0603 X7R 50V YAGEO CC2", Manufacturer=Yageo, Package=0603, Supplier Part Number 1=1362556, Tolerance (%)=10, Voltage Rating (Volts)=50, Category=Capacitor, ComponentLink1Description="Manufacturer Website", ComponentLink1URL=http://www.yageo.com, Manufacturer Part Number=CC0603KRX7R9BB104, Supplier 1=Farnell, Supplier 2=Digi-Key, Supplier Part Number 2=311-1344-1-ND
C2 C3 C34 C35: library part CC0603JRNPO9BN100, "CAP 10pF SM0603 NPO 50V YAGEO CC2", Manufacturer=Yageo, Package=0603, Supplier Part Number 1=721967, Tolerance (%)=5, Voltage Rating (Volts)=50, Category=Capacitor, ComponentLink1Description="Manufacturer Website", ComponentLink1URL=http://www.yageo.com, Manufacturer Part Number=CC0603JRNPO9BN100, Supplier 1=Farnell, Supplier 2=Digi-Key, Supplier Part Number 2=311-1058-1-ND
C12 C13 C18 C19: library part CC0603KRX7R9BB102, "CAP 1nF SM0603 X7R 50V YAGEO CC2", Manufacturer=Yageo, Package=0603, Supplier Part Number 1=722170, Tolerance (%)=10, Voltage Rating (Volts)=50, Category=Capacitor, ComponentLink1Description="Manufacturer Website", ComponentLink1URL=http://www.yageo.com, Manufacturer Part Number=CC0603KRX7R9BB102, Supplier 1=Farnell, Supplier 2=Digi-Key, Supplier Part Number 2=311-1080-1-ND
C20 C21 C22 C23 C37 C41 C48 C53 C54: library part CC0805KKX7R8BB105, "CAP 1uF SM0805 X7R 25V YAGEO CC2", Manufacturer=Yageo, Package=0805, Supplier Part Number 1=1458903, Tolerance (%)=10, Voltage Rating (Volts)=25, Category=Capacitor, ComponentLink1Description="Manufacturer Website", ComponentLink1URL=http://www.yageo.com, Manufacturer Part Number=CC0805KKX7R8BB105, Supplier 1=Farnell, Supplier 2=Digi-Key, Supplier Part Number 2=311-1456-1-ND
C24 C25 C26 C27 C28 C29 C30 C31 C32 C33 C55 C56 C69 C70: library part CC0402KRX7R9BB104, "CAP 100nF SM0805 X7R 50V YAGEO CC2", Manufacturer=Yageo, Package=0402, Tolerance (%)=10, Voltage Rating (Volts)=50, Category=Capacitor, ComponentLink1Description="Manufacturer Website", ComponentLink1URL=http://www.yageo.com, Manufacturer Part Number=CC0402KRX7R9BB104, Supplier 2=Digi-Key, Supplier Part Number 2=311-3566-1-ND
C59 C60 C61 C62 C63 C64 C65 C66: library part CC0805KKX7R8BB225, "CAP 2u2F SM0805 X7R 25V YAGEO CC2", Manufacturer=Yageo, Package=0805, Supplier Part Number 1=1458904, Tolerance (%)=10, Voltage Rating (Volts)=25, Category=Capacitor, ComponentLink1Description="Manufacturer Website", ComponentLink1URL=http://www.yageo.com, Manufacturer Part Number=CC0805KKX7R8BB225, Supplier 1=Farnell, Supplier 2=Digi-Key
D1 D2 D3 "D4_U_USB A Filter P2" "D4_U_USB A Filter P3" "D4_U_USB A Filter P4" "D5_U_USB A Filter P2" "D5_U_USB A Filter P3" "D5_U_USB A Filter P4": "TVS DIODE 3.3VWM 8VC 10UDFN"
"D6_U_USB A Filter P2" "D6_U_USB A Filter P3" "D6_U_USB A Filter P4" D7: "TVS DIODE 5VWM SOD923"
J1: "CONN JACK 1PORT 1000 BASE-T SMD"
J2: "CONN RCP USB3.1 TYPEC 24P SMD RA"
J3 J4 J5: "CONN RCPT USB3.0 TYPEA 9POS R/A"
R1 R2 R8: library part RC0603FR-0710KL, "RES 10K SM0603 YAGEO RC_L", Manufacturer=Yageo, Package=0603, Power (Watts)=0.1, Resistance (Ohms)=10000, Supplier Part Number 1=9238603, Tolerance (%)=1, Category=Resistor, ComponentLink1Description="Manufacturer Website", ComponentLink1URL=http://www.yageo.com, Manufacturer Part Number=RC0603FR-0710KL, Supplier 1=Farnell, Supplier 2=Digi-Key, Supplier Part Number 2=311-10.0KHRCT-ND
R3 R4: library part RC0603FR-07200KL, "RES 200K SM0603 YAGEO RC_L", Manufacturer=Yageo, Package=0603, Power (Watts)=0.1, Resistance (Ohms)=200000, Tolerance (%)=1, Category=Resistor, ComponentLink1Description="Manufacturer Website", ComponentLink1URL=http://www.yageo.com, Manufacturer Part Number=RC0603FR-07200KL, Supplier 2=Digi-Key, Supplier Part Number 2=311-200KHRCT-ND
R5: library part RC0603FR-0739KL, "RES 39K SM0603 YAGEO RC_L", Manufacturer=Yageo, Package=0603, Power (Watts)=0.1, Resistance (Ohms)=39000, Supplier Part Number 1=9238670, Tolerance (%)=1, Category=Resistor, ComponentLink1Description="Manufacturer Website", ComponentLink1URL=http://www.yageo.com, Manufacturer Part Number=RC0603FR-0739KL, Supplier 1=Farnell, Supplier 2=Digi-Key, Supplier Part Number 2=311-39.0KHRCT-ND
R6 R14 R17 R18: library part RC0603FR-0712KL, "RES 12K SM0603 YAGEO RC_L", Manufacturer=Yageo, Package=0603, Power (Watts)=0.1, Resistance (Ohms)=12000, Supplier Part Number 1=9238611, Tolerance (%)=1, Category=Resistor, ComponentLink1Description="Manufacturer Website", ComponentLink1URL=http://www.yageo.com, Manufacturer Part Number=RC0603FR-0712KL, Supplier 1=Farnell, Supplier 2=Digi-Key, Supplier Part Number 2=311-12.0KHRCT-ND
R7: library part RC0603FR-0782KL, "RES 82K SM0603 YAGEO RC_L", Manufacturer=Yageo, Package=0603, Power (Watts)=0.1, Resistance (Ohms)=82000, Supplier Part Number 1=9238719, Tolerance (%)=1, Category=Resistor, ComponentLink1Description="Manufacturer Website", ComponentLink1URL=http://www.yageo.com, Manufacturer Part Number=RC0603FR-0782KL, Supplier 1=Farnell, Supplier 2=Digi-Key, Supplier Part Number 2=311-82.0KHRCT-ND
R9 R10: library part RC0603FR-074K7L, "RES 4K7 SM0603 YAGEO RC_L", Manufacturer=Yageo, Package=0603, Power (Watts)=0.1, Resistance (Ohms)=4700, Supplier Part Number 1=9238565, Tolerance (%)=1, Category=Resistor, ComponentLink1Description="Manufacturer Website", ComponentLink1URL=http://www.yageo.com, Manufacturer Part Number=RC0603FR-074K7L, Supplier 1=Farnell, Supplier 2=Digi-Key, Supplier Part Number 2=311-4.70KHRCT-ND
R11: library part RC0603FR-07220KL, "RES 220K SM0603 YAGEO RC_L", Manufacturer=Yageo, Package=0603, Power (Watts)=0.1, Resistance (Ohms)=220000, Supplier Part Number 1=9238760, Tolerance (%)=1, Category=Resistor, ComponentLink1Description="Manufacturer Website", ComponentLink1URL=http://www.yageo.com, Manufacturer Part Number=RC0603FR-07220KL, Supplier 1=Farnell, Supplier 2=Digi-Key, Supplier Part Number 2=311-220KHRCT-ND
R12: library part RC0603FR-07909KL, "RES 909K SM0603 YAGEO RC_L", Manufacturer=Yageo, Package=0603, Power (Watts)=0.1, Resistance (Ohms)=909000, Tolerance (%)=1, Category=Resistor, ComponentLink1Description="Manufacturer Website", ComponentLink1URL=http://www.yageo.com, Manufacturer Part Number=RC0603FR-07909KL, Supplier 2=Digi-Key, Supplier Part Number 2=311-909KHRCT-ND
"R13_U_Load Switch 2" "R13_U_Load Switch 3" "R13_U_Load Switch 4": library part RC0603FR-07270RL, "RES 270R SM0603 YAGEO RC_L", Manufacturer=Yageo, Package=0603, Power (Watts)=0.1, Resistance (Ohms)=270, Supplier Part Number 1=9238417, Tolerance (%)=1, Category=Resistor, ComponentLink1Description="Manufacturer Website", ComponentLink1URL=http://www.yageo.com, Manufacturer Part Number=RC0603FR-07270RL, Supplier 1=Farnell, Supplier 2=Digi-Key, Supplier Part Number 2=311-270HRCT-ND
R15 R16: library part RC0603FR-071KL, "RES 1K SM0603 YAGEO RC_L", Manufacturer=Yageo, Package=0603, Power (Watts)=0.1, Resistance (Ohms)=1000, Supplier Part Number 1=9238484, Tolerance (%)=1, Category=Resistor, ComponentLink1Description="Manufacturer Website", ComponentLink1URL=http://www.yageo.com, Manufacturer Part Number=RC0603FR-071KL, Supplier 1=Farnell, Supplier 2=Digi-Key, Supplier Part Number 2=311-1.00KHRCT-ND
"R19_U_USB A Filter P2" "R19_U_USB A Filter P3" "R19_U_USB A Filter P4" R20: library part RC0603FR-07330RL, "RES 330R SM0603 YAGEO RC_L", Manufacturer=Yageo, Package=0603, Power (Watts)=0.1, Resistance (Ohms)=330, Supplier Part Number 1=9238425, Tolerance (%)=1, Category=Resistor, ComponentLink1Description="Manufacturer Website", ComponentLink1URL=http://www.yageo.com, Manufacturer Part Number=RC0603FR-07330RL, Supplier 1=Farnell, Supplier 2=Digi-Key, Supplier Part Number 2=311-330HRCT-ND
R21: library part RC0603FR-0768KL, "RES 68K SM0603 YAGEO RC_L", Manufacturer=Yageo, Package=0603, Power (Watts)=0.1, Resistance (Ohms)=68000, Supplier Part Number 1=9238700, Tolerance (%)=1, Category=Resistor, ComponentLink1Description="Manufacturer Website", ComponentLink1URL=http://www.yageo.com, Manufacturer Part Number=RC0603FR-0768KL, Supplier 1=Farnell, Supplier 2=Digi-Key, Supplier Part Number 2=311-68.0KHRCT-ND
R22: library part RC0603FR-0722KL, "RES 22K SM0603 YAGEO RC_L", Manufacturer=Yageo, Package=0603, Power (Watts)=0.1, Resistance (Ohms)=22000, Supplier Part Number 1=9238646, Tolerance (%)=1, Category=Resistor, ComponentLink1Description="Manufacturer Website", ComponentLink1URL=http://www.yageo.com, Manufacturer Part Number=RC0603FR-0722KL, Supplier 1=Farnell, Supplier 2=Digi-Key, Supplier Part Number 2=311-22.0KHRCT-ND
R23: library part RC0603FR-0756KL, "RES 56K SM0603 YAGEO RC_L", Manufacturer=Yageo, Package=0603, Power (Watts)=0.1, Resistance (Ohms)=56000, Supplier Part Number 1=9238697, Tolerance (%)=1, Category=Resistor, ComponentLink1Description="Manufacturer Website", ComponentLink1URL=http://www.yageo.com, Manufacturer Part Number=RC0603FR-0756KL, Supplier 1=Farnell, Supplier 2=Digi-Key, Supplier Part Number 2=311-56KHRCT-ND
R24 R27 R28 R29 R30: library part RC0603FR-07120KL, "RES 120K SM0603 YAGEO RC_L", Manufacturer=Yageo, Package=0603, Power (Watts)=0.1, Resistance (Ohms)=120000, Supplier Part Number 1=9238735, Tolerance (%)=1, Category=Resistor, ComponentLink1Description="Manufacturer Website", ComponentLink1URL=http://www.yageo.com, Manufacturer Part Number=RC0603FR-07120KL, Supplier 1=Farnell, Supplier 2=Digi-Key, Supplier Part Number 2=311-120KHRCT-ND
R25 R26: library part RC0603FR-07100RL, "RES 100R SM0603 YAGEO RC_L", Manufacturer=Yageo, Package=0603, Power (Watts)=0.1, Resistance (Ohms)=100, Supplier Part Number 1=9238360, Tolerance (%)=1, Category=Resistor, ComponentLink1Description="Manufacturer Website", ComponentLink1URL=http://www.yageo.com, Manufacturer Part Number=RC0603FR-07100RL, Supplier 1=Farnell, Supplier 2=Digi-Key, Supplier Part Number 2=311-100HRCT-ND
U1: "IC HUB CTLR USB 56VQFN"
U2: "IC ETHERNET CTLR USB 48SQFN 7x7"
U3: "USB TYPE-C DRP PORT CONTROLLER W"
U4: "IC EEPROM 4KBIT MICROWIRE 8SOIC"
"U5_U_Load Switch 2" "U5_U_Load Switch 3" "U5_U_Load Switch 4": "IC PWR SWITCH N-CHAN 1:1 8MSOP"
U6 U7: "DC DC CONVERTER 0.8-18.48V"
Y1 Y2: "CRYSTAL 25.0000MHZ 10PF SMD"

## Via types
v1: diameter 19.68, hole 7.87, Component Side to Solder Side, 41 vias
v2: diameter 12, hole 8, Component Side to Solder Side, 35 vias

## Nets (pads, with @x,y where several pads share a name; then routed paths per layer and width w, separated by ;. In a path a pad name is that pad's centre, name@x,y a point inside that pad or via, vN(x,y) a via of type N, cw(c..) or ccw(c..) an arc to the next point about the centre after c; other vN are vias at no path point)
CC1: D3.5 J2.A5 U3.2 | length 643.4
  Component Side w6: v2(474.88,939.88) U3.2 ; v2(560,1240) 599.37,1279.37 599.37,1349.25 599.37,1380.75 599.01,1381.1 J2.A5
  Solder Side w6: v2(474.88,939.88) 465,949.76 465,1145 v2(560,1240)
CC2: D3.1 J2.B5 U3.1 | length 679.7
  Component Side w6: v2(440,940) 459.13,959.13 U3.1 ; v2(495,1300) 520.63,1325.63 520.63,1349.25 520.63,1380.75 v2(520.63,1410.63) ; v2(530,1515) 530,1537.72 J2.B5
  Solder Side w6: v2(440,940) 440,1245 v2(495,1300) ; v2(520.63,1410.63) 520.63,1505.63 v2(530,1515)
DFP1_D_N: U1.2 U2.27
DFP1_D_P: U1.1 U2.26
DFP1_RXa_N: C56.1 U1.7
DFP1_RXa_P: C55.1 U1.6
DFP1_RXb_N: C56.2 U2.29
DFP1_RXb_P: C55.2 U2.28
DFP1_TXa_N: C26.1 U1.4
DFP1_TXa_P: C24.1 U1.3
DFP1_TXb_N: C26.2 U2.32
DFP1_TXb_P: C24.2 U2.31
DFP2_D_N: "D5_U_USB A Filter P2.4" J3.2 U1.9 | length 470.3
  Component Side w6: J3.2 3715.25,1916.48 3715.25,1935.25 3723,1943 3860.03,1943 3905,1898.03 3905,1795 3883.53,1773.53 3883.53,1732.43 3879.68,1728.59 3879.68,1715.75
DFP2_D_P: "D5_U_USB A Filter P2.5" J3.3 U1.8 | length 510.1
  Component Side w6: J3.3 3703.25,1916.48 3703.25,1940.22 3718.03,1955 3865,1955 3917,1903 3917,1790.03 3895.53,1768.56 3895.53,1732.43 3899.37,1728.59 3899.37,1715.75
DFP2_RX_N: "D4_U_USB A Filter P2.1" J3.5 U1.14
DFP2_RX_P: "D4_U_USB A Filter P2.2" J3.6 U1.13
DFP2_TXa_N: C29.1 U1.11
DFP2_TXa_P: C28.1 U1.10
DFP2_TXb_N: "D5_U_USB A Filter P2.1" C29.2 J3.8 | length 130.8
  Component Side w6: J3.8 3802.3,1824.06 3821.36,1805 3821.36,1729.32 3820.63,1728.59 3820.63,1715.75
DFP2_TXb_P: "D5_U_USB A Filter P2.2" C28.2 J3.9 | length 133.4
  Component Side w6: 3840.32,1715.75 3840.32,1728.59 3833.36,1735.54 3833.36,1805 3852.42,1824.06 J3.9
DFP3_D_N: "D5_U_USB A Filter P3.4" J4.2 U1.18
DFP3_D_P: "D5_U_USB A Filter P3.5" J4.3 U1.17
DFP3_RX_N: "D4_U_USB A Filter P3.1" J4.5 U1.23
DFP3_RX_P: "D4_U_USB A Filter P3.2" J4.6 U1.22
DFP3_TXa_N: C31.1 U1.20
DFP3_TXa_P: C30.1 U1.19
DFP3_TXb_N: "D5_U_USB A Filter P3.1" C31.2 J4.8
DFP3_TXb_P: "D5_U_USB A Filter P3.2" C30.2 J4.9
DFP4_D_N: "D5_U_USB A Filter P4.4" J5.2 U1.25
DFP4_D_P: "D5_U_USB A Filter P4.5" J5.3 U1.24
DFP4_RX_N: "D4_U_USB A Filter P4.1" J5.5 U1.29
DFP4_RX_P: "D4_U_USB A Filter P4.2" J5.6 U1.30
DFP4_TXa_N: C33.1 U1.27
DFP4_TXa_P: C32.1 U1.26
DFP4_TXb_N: "D5_U_USB A Filter P4.1" C33.2 J5.8
DFP4_TXb_P: "D5_U_USB A Filter P4.2" C32.2 J5.9
"DFP PCTL2": "U5_U_Load Switch 2.1" "U5_U_Load Switch 2.2" U1.35
"DFP PCTL3": "U5_U_Load Switch 3.1" "U5_U_Load Switch 3.2" U1.34
"DFP PCTL4": "U5_U_Load Switch 4.1" "U5_U_Load Switch 4.2" U1.32
"DUPLEX LED3": J1.13 U2.33
GND: "C36_U_Load Switch 2.2" "C36_U_Load Switch 3.2" "C36_U_Load Switch 4.2" "C57_U_USB A Filter P2.2" "C57_U_USB A Filter P3.2" "C57_U_USB A Filter P4.2" "C67_U_USB A Filter P2.2" "C67_U_USB A Filter P3.2" "C67_U_USB A Filter P4.2" "D4_U_USB A Filter P2.GND" "D4_U_USB A Filter P3.GND" "D4_U_USB A Filter P4.GND" "D5_U_USB A Filter P2.GND" "D5_U_USB A Filter P3.GND" "D5_U_USB A Filter P4.GND" "D6_U_USB A Filter P2.2" "D6_U_USB A Filter P3.2" "D6_U_USB A Filter P4.2" "R13_U_Load Switch 2.1" "R13_U_Load Switch 3.1" "R13_U_Load Switch 4.1" "R19_U_USB A Filter P2.1" "R19_U_USB A Filter P3.1" "R19_U_USB A Filter P4.1" "U5_U_Load Switch 2.3" "U5_U_Load Switch 3.3" "U5_U_Load Switch 4.3" C1.2 C2.1 C3.1 C4.2 C5.2 C6.2 C7.2 C8.2 C9.2 C10.2 C11.2 C12.2 C13.2 C14.2 C15.2 C16.2 C17.2 C18.2 C19.2 C20.2 C21.2 C22.2 C23.2 C34.2 C35.2 C37.2 C38.2 C39.2 C40.2 C41.2 C42.2 C43.2 C44.2 C45.2 C46.2 C47.2 C48.2 C49.2 C50.2 C51.2 C52.2 C53.2 C54.2 C58.2 C59.2 C60.2 C61.2 C62.2 C63.2 C64.2 C65.2 C66.2 C68.2 D1.GND D2.GND D3.GND D7.2 J1.12 J2.A1 J2.A12 J2.B1 J2.B12 J3.4 J3.7 J4.4 J4.7 J5.4 J5.7 J9.1 R4.1 R6.1 R7.1 R16.2 R17.1 R20.1 R22.1 R24.1 R25.1 R26.1 U1.52 U1.57 U2.34 U2.PAD U3.4 U3.12 U3.13 U3.28 U3.29 U3.31 U4.5 U4.6 U6.3 U6.12 U6.13 U6.14 U7.3 U7.12 U7.13 U7.14 Y1.GND Y2.GND | length 309.1
  Component Side w8: U3.29 386.97,1013.03 381.22,1018.78 v2(381.22,1028.78) U3.28
  Component Side w10: v2(415,1320) 415,1349.25 D2.GND@415,1380.75 ; D3.GND@560,1349.25 560,1380.75 v2(560,1410) ; v2(700,1320) 700,1349.25 D1.GND@700,1380.75
  other v1: 1143.39,658.39 1186.69,658.39 1230,658.39 1273.31,658.39 1316.61,658.39 1143.39,701.69 1186.69,701.69 1230,701.69 1273.31,701.69 1316.61,701.69 1143.39,745 1186.69,745 1230,745 1273.31,745 1316.61,745 3175.04,780.04 3218.35,780.04 3261.65,780.04 3304.96,780.04 1143.39,788.31 1186.69,788.31 1230,788.31 1273.31,788.31 1316.61,788.31 3175.04,823.35 3218.35,823.35 3261.65,823.35 3304.96,823.35 1143.39,831.61 1186.69,831.61 1230,831.61 1273.31,831.61 1316.61,831.61 3175.04,866.65 3218.35,866.65 3261.65,866.65 3304.96,866.65 3175.04,909.96 3218.35,909.96 3261.65,909.96 3304.96,909.96
"LINK LED2": J1.1 U2.24
"MUX SHD": C58.1 J2.SHD R20.2
MUX_RX_N: U1.51 U3.9 | length 187.4
  Component Side w6: U3.9 585.12,962.79 586.99,960.91 586.99,790
MUX_RX_P: U1.50 U3.10 | length 187.4
  Component Side w6: 598.99,790 598.99,960.91 600.87,962.79 U3.10
MUX_TX_N: U1.48 U3.6 | length 223.4
  Component Side w6: U3.6 537.87,962.79 539.75,960.91 539.75,927 v2(537.75,925) v2@539.75,925
  Solder Side w6: v2(537.75,925) 539.75,923 539.75,900.03 623,816.78 623,797 v2(621,795) v2@623,795
MUX_TX_P: U1.47 U3.7 | length 219.4
  Component Side w6: U3.7 553.62,962.79 551.75,960.91 551.75,927 v2(553.75,925)
  Solder Side w6: v2(553.75,925) 551.75,923 551.75,905 635,821.75 635,797 v2(637,795)
NetC1_1: C1.1 R8.1 U1.42
NetC2_2: C2.2 U1.54 Y1.1
NetC3_2: C3.2 U1.53 Y1.3
NetC34_1: C34.1 U2.40 Y2.1
NetC35_1: C35.1 U2.41 Y2.3
NetC37_1: C37.1 U2.48
"NetC57_U_USB A Filter P2_1": "C57_U_USB A Filter P2.1" "R19_U_USB A Filter P2.2" J3.SHD
"NetC57_U_USB A Filter P3_1": "C57_U_USB A Filter P3.1" "R19_U_USB A Filter P3.2" J4.SHD
"NetC57_U_USB A Filter P4_1": "C57_U_USB A Filter P4.1" "R19_U_USB A Filter P4.2" J5.SHD
NetJ1_2: J1.2 R26.2
NetJ1_14: J1.14 R25.2
NetR1_2: R1.2 U1.39
NetR2_2: R2.2 U1.38
NetR3_2: R3.2 U1.41
NetR4_2: R4.2 U1.40
NetR5_1: R5.1 R7.2 U1.37
NetR6_2: R6.2 U1.56
NetR9_1: R9.1 U3.25 | length 550.7
  Component Side w6: R9.1 v2(360,715) ; v2(409.13,1100.87) 454.13,1100.87 459.13,1095.87 U3.25
  Solder Side w6: v2(360,715) 360,1051.73 v2(409.13,1100.87)
NetR10_1: R10.1 U3.26 | length 446.1
  Component Side w6: R10.1 v2(330.98,780.98) ; v2(360,1080) 379.72,1060.28 U3.26
  Solder Side w6: v2(330.98,780.98) 330.98,1050.98 v2(360,1080)
NetR11_1: R11.1 U3.11 | length 496.6
  Component Side w6: R11.1 v2(400,845) ; U3.11 647.72,997.28 660,985 v2(660,955)
  Solder Side w6: v2(400,845) 510,955 v2(660,955)
NetR12_1: R12.1 U3.5 | length 287.4
  Component Side w6: R12.1 490,910 522.13,942.13 U3.5
"NetR13_U_Load Switch 2_2": "R13_U_Load Switch 2.2" "U5_U_Load Switch 2.5" | length 116.3
  Component Side w6: 3898.39,1377.6 3898.39,1336.61 3907.44,1327.56 3970,1327.56
"NetR13_U_Load Switch 3_2": "R13_U_Load Switch 3.2" "U5_U_Load Switch 3.5" | length 116.3
  Component Side w6: 3258.39,1555.16 3258.39,1514.17 3267.44,1505.12 3330,1505.12
"NetR13_U_Load Switch 4_2": "R13_U_Load Switch 4.2" "U5_U_Load Switch 4.5" | length 116.3
  Component Side w6: 2158.39,1005.04 2158.39,964.06 2167.44,955 2230,955
NetR14_1: R14.1 U2.35
NetR15_1: R15.1 U2.47
NetR15_2: R15.2 R16.1
NetR17_2: R17.2 U2.37
NetR18_1: R18.1 U2.23
NetR21_1: R21.1 R22.2 U6.1
NetR23_1: R23.1 R24.2 U7.1
NetR27_2: R27.2 U6.17
NetR28_1: R28.1 U6.2
NetR28_2: R28.2 U6.18
NetR29_2: R29.2 U7.17
NetR30_1: R30.1 U7.2
NetR30_2: R30.2 U7.18
NetU1_36: U1.36
NetU2_16: U2.16 U4.1
NetU2_17: U2.17 U4.4
NetU2_18: U2.18 U4.3
NetU2_19: U2.19 U4.2
TR0_N: J1.4 U2.2
TR0_P: J1.3 U2.1
TR1_N: J1.6 U2.5
TR1_P: J1.5 U2.4
TR2_N: J1.8 U2.8
TR2_P: J1.7 U2.7
TR3_N: J1.10 U2.11
TR3_P: J1.9 U2.10
UFP_D_N: D3.2 J2.A7 J2.B7 U1.46 | length 283.4
  Component Side w6: J2.A7 v2(539.96,1459.96) 540.32,1459.6 540.32,1380.75 540.32,1349.25 540.32,1336.41 554,1322.72 554,1302 v2(552,1300) ; v2(569.49,1514.49) J2.B7
  Solder Side w6: v2(539.96,1459.96) 539.96,1484.96 v2(569.49,1514.49)
UFP_D_P: D3.4 J2.A6 J2.B6 U1.45 | length 263.1
  Component Side w6: J2.B6 550,1537.64 550,1510 560,1500 560,1495 568.34,1486.66 J2.A6 579.33,1469.88 579.68,1469.52 579.68,1380.75 579.68,1349.25 579.68,1336.41 566,1322.72 566,1302 v2(568,1300)
UFP_RX1_N: D1.4 J2.B10 U3.15 | length 593.7
  Component Side w6: U3.15 635.36,1060.28 637.24,1058.4 673.4,1058.4 723.53,1108.53 723.53,1185 723.53,1305 723.53,1332.57 719.68,1336.41 719.68,1349.25 719.68,1380.75 719.68,1393.59 721.53,1395.43 v2(721.53,1410) ; J2.B10 628.54,1521.06 630.38,1519.22 v2(630.38,1515)
  Solder Side w6: v2(630.38,1515) 630.38,1512.62 721.53,1421.47 v2(721.53,1410)
UFP_RX1_P: D1.5 J2.B11 U3.14 | length 613.6
  Component Side w6: U3.14 635.36,1044.53 637.24,1046.4 678.37,1046.4 735.53,1103.56 735.53,1185 735.53,1305 735.53,1332.57 739.37,1336.41 739.37,1349.25 739.37,1380.75 739.37,1393.59 737.53,1395.43 v2(737.53,1410) ; v2(646.38,1515) 646.38,1519.22 648.23,1521.06 J2.B11
  Solder Side w6: v2(646.38,1515) 737.53,1423.86 v2(737.53,1410)
UFP_RX2_N: D2.5 J2.A10 U3.18 | length 470.7
  Component Side w6: J2.A10 480.9,1469.88 477.06,1466.04 477.06,1437.06 450.53,1410.53 450.53,1397.43 454.37,1393.59 454.37,1380.75 454.37,1349.25 454.37,1336.41 450.53,1332.57 450.53,1256.44 567.5,1139.47 567.5,1096.65 569.37,1094.77 U3.18
UFP_RX2_P: D2.4 J2.A11 U3.19 | length 470.7
  Component Side w6: J2.A11 461.22,1469.88 465.06,1466.04 465.06,1442.03 438.53,1415.5 438.53,1397.43 434.69,1393.59 434.69,1380.75 434.69,1349.25 434.69,1336.41 438.53,1332.57 438.53,1251.47 555.5,1134.5 555.5,1096.65 553.62,1094.77 U3.19
UFP_TX1_N: C27.1 D1.1 J2.A3 | length 231.4
  Component Side w6: J2.A3 638.38,1469.88 642.23,1466.04 642.23,1440.8 664.47,1418.56 664.47,1397.43 660.63,1393.59 660.63,1380.75 660.63,1349.25 660.63,1336.41 664.47,1332.57 664.47,1296.8 C27.1
UFP_TX1_P: C25.1 D1.2 J2.A2 | length 231
  Component Side w6: J2.A2 658.07,1469.88 654.23,1466.04 654.23,1445.77 676.47,1423.53 676.47,1397.43 680.32,1393.59 680.32,1380.75 680.32,1349.25 680.32,1336.41 676.47,1332.57 676.47,1295.85 C25.1
UFP_TX1b_N: C25.2 U3.16 | length 202.3
  Component Side w6: U3.16 600.87,1094.77 598.99,1096.65 598.99,1115 676,1192.01 676,1223.68 C25.2
UFP_TX1b_P: C27.2 U3.17 | length 202.3
  Component Side w6: U3.17 585.12,1094.77 586.99,1096.65 586.99,1119.97 664,1196.98 664,1223.68 C27.2
UFP_TX2_N: C70.1 D2.2 J2.B3 | length 310.8
  Component Side w6: v2(393.47,1410) 393.47,1395.43 395.31,1393.59 395.31,1380.75 395.31,1349.25 395.31,1336.41 391.47,1332.57 391.47,1295.85 C70.1 ; v2(488.9,1515) 488.9,1519.22 490.75,1521.06 J2.B3
  Solder Side w6: v2(393.47,1410) 393.47,1417.18 488.9,1512.62 v2(488.9,1515)
UFP_TX2_P: C69.1 D2.1 J2.B2 | length 311.2
  Component Side w6: C69.1 379.47,1296.8 379.47,1332.57 375.63,1336.41 375.63,1349.25 375.63,1380.75 375.63,1393.59 377.47,1395.43 v2(377.47,1410) ; J2.B2 471.06,1521.06 472.9,1519.22 v2(472.9,1515)
  Solder Side w6: v2(377.47,1410) 377.47,1419.57 v2(472.9,1515)
UFP_TX2b_N: C70.2 U3.20 | length 283.7
  Component Side w6: C70.2 391,1223.68 391,1174 413,1152 503.97,1152 536,1119.97 536,1096.65 537.87,1094.77 U3.20
UFP_TX2b_P: C69.2 U3.21 | length 283.7
  Component Side w6: C69.2 379,1223.68 379,1169.03 408.03,1140 499,1140 524,1115 524,1096.65 522.13,1094.77 U3.21
VBUS: "C36_U_Load Switch 2.1" "C36_U_Load Switch 3.1" "C36_U_Load Switch 4.1" "U5_U_Load Switch 2.7" "U5_U_Load Switch 3.7" "U5_U_Load Switch 4.7" C20.1 C21.1 C59.1 C63.1 J6.1 J10.1 R5.2 R12.2 R27.1 R29.1 U3.30 U6.16 U7.16 | length 821.1
  Component Side w6: R12.2 217.44,942.44 225,950 275,950 286.5,961.5 C21.1 289.21,997.28 U3.30
  Component Side w10: C20.1 286.5,1089.02 C21.1
  Component Side w20: 2010,951.06 2093.62,951.06 2107.2,964.65 2107.2,1005.04 ; 3110,1501.18 3193.62,1501.18 3207.2,1514.76 3207.2,1555.16 ; 3750,1323.62 3833.62,1323.62 3847.2,1337.2 3847.2,1377.6
VBUS2: "C67_U_USB A Filter P2.1" "D6_U_USB A Filter P2.1" "U5_U_Load Switch 2.6" "U5_U_Load Switch 2.8" J3.1